# Altium PCB 400236.PcbDoc (part 7 of 7)
Units mm, origin at the board's own origin, x right, y up, seen from the top; angles counter-clockwise.
Board outline 136.53 x 63.5 mm, 4 copper layers (Top Layer, Mid-Layer 1, Mid-Layer 2, Bottom Layer), stack 1.49 mm thick; 344 components, 236 nets, 1364 pads, 1393 vias.
Unrouted connection lines stored in the file: 6.
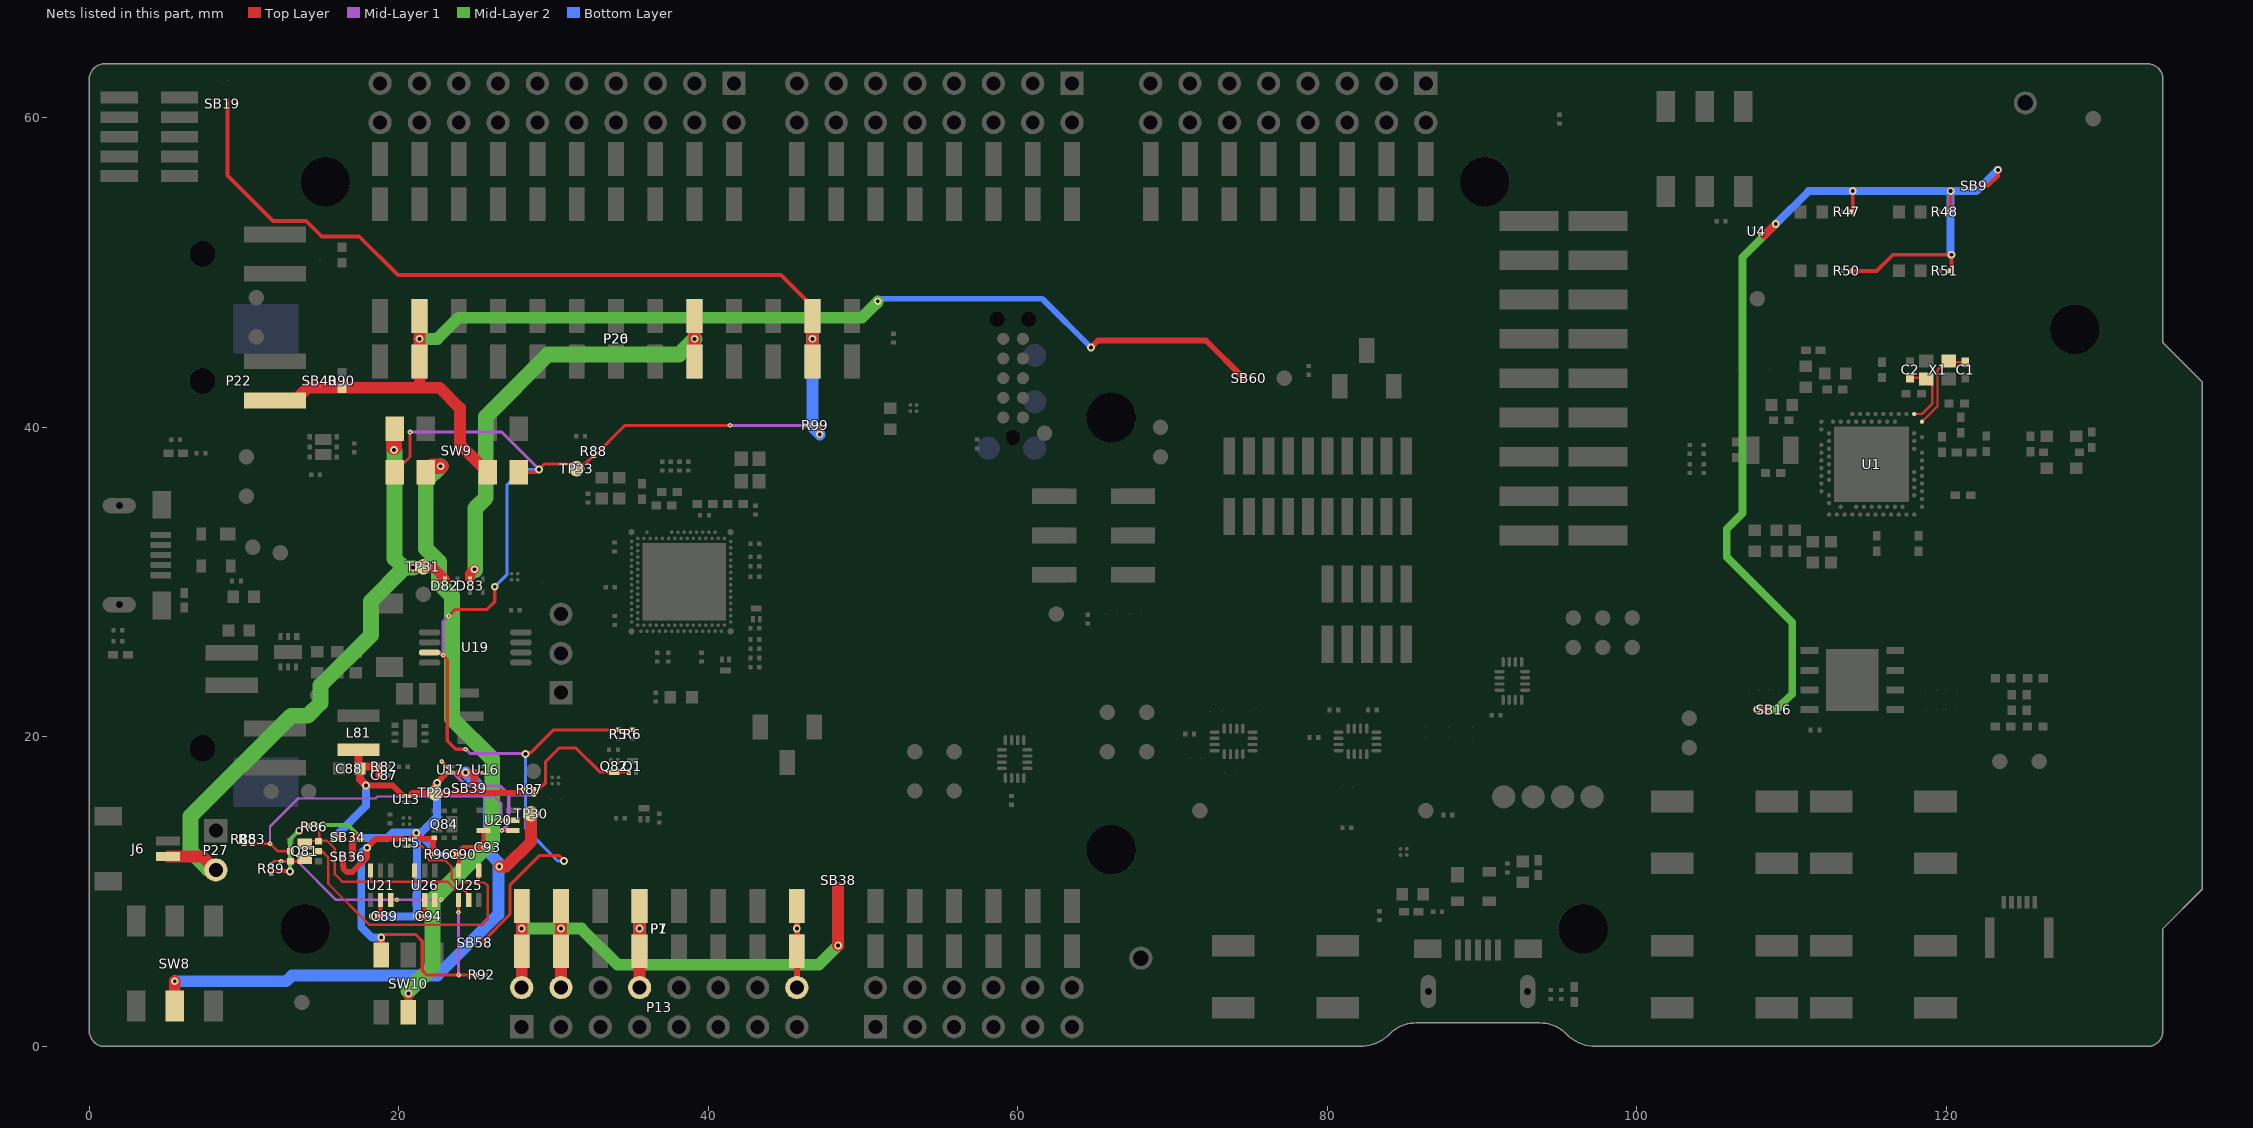
[diagram p7: the nets of this part, all layers, seen from the top]

## Via types
v1: diameter 0.5, hole 0.25, Top Layer to Bottom Layer, tented both sides, 1166 vias
v2: diameter 0.3, hole 0.1, Top Layer to Mid-Layer 1, tented top, 227 vias

## Nets (pads, with @x,y where several pads share a name; then routed paths per layer and width w, separated by ;. In a path a pad name is that pad's centre, name@x,y a point inside that pad or via, vN(x,y) a via of type N, cw(c..) or ccw(c..) an arc to the next point about the centre after c; other vN are vias at no path point) (continued)
VDD_NRF': P20.2 P22.2 P26.2 R90.1 SB40.2 SB60.2 SW9.3 | length 85.3
  Top Layer w0.381: v1(64.719,45.161) 65.176,45.618 72.154,45.618 SB60.2@74.592,43.18
  Top Layer w0.508: P20.2@21.336,44.255 v1(21.336,45.72) P20.2@21.336,47.185
  Top Layer w0.762: P22.2@11.811,41.73 13.284,41.73 14.115,42.561 21.361,42.561 ; P20.2@21.336,47.185 v1(21.336,45.72) P20.2@21.336,44.255 21.361,44.23 21.361,42.561 ; SW9.3@25.749,37.106 23.952,38.903 23.952,41.25 22.641,42.561 21.361,42.561
  Mid-Layer 2 w0.762: v1(21.336,45.72) 22.495,45.72 23.856,47.081 24.748,47.081 49.926,47.081 50.891,48.046 50.891,48.058 50.95,48.118 v1(50.95,48.15)
  Bottom Layer w0.381: v1(50.95,48.15) 50.982,48.15 51.143,48.311 61.57,48.311 v1(64.719,45.161)
  Bottom Layer w0.508: P26.2@21.336,44.255 v1(21.336,45.72) P26.2@21.336,47.185
VDD_NRF_SENSE: R5.1 R6.2 R88.1 R99.1 SB58.1 SW9.1 SW9.4 TP33.1 U19.3 | length 85.6
  Top Layer w0.203: SW9.1@19.749,37.106 20.726,38.084 v2(20.726,39.7) ; U19.3@21.993,25.456 22.677,25.456 v2(22.86,25.273) 23.129,25.004 23.129,19.747 23.673,19.202 v2(24.311,19.202) ; v2(23.216,27.813) 23.647,28.245 25.705,28.245 26.2,28.74 v1(26.2,29.705) ; SB58.1@25.255,6.706 25.356,6.706 27.178,8.528 27.178,10.408 29.117,12.347 30.325,12.347 v1(30.683,11.989) ; SW9.4@27.749,37.106 28.877,37.106 v1(29.058,37.287) 29.413,37.643 32.06,37.643 32.54,38.122 32.54,38.137 32.573,38.171 R88.1@32.588,38.171 ; v1(28.194,18.898) 28.272,18.975 28.525,18.975 30.01,20.46 R5.1@34.175,20.46 R6.2@35.1,20.46 ; R88.1@32.619,38.137 34.613,40.132 v2(41.402,40.132) ; v2(46.25,40.15) R99.1@46.615,40.15
  Mid-Layer 1 w0.203: v2(20.726,39.7) 26.645,39.7 v1(29.058,37.287) ; v2(22.86,25.273) 22.86,27.457 v2(23.216,27.813) ; v2(24.311,19.202) 24.351,19.202 24.634,18.919 28.173,18.919 v1(28.194,18.898) ; v2(41.402,40.132) 46.232,40.132 v2(46.25,40.15)
  Bottom Layer w0.203: v1(26.2,29.705) 27,30.505 27,36.297 27.991,37.287 v1(29.058,37.287) ; v1(28.194,18.898) 28.194,14.078 30.283,11.989 v1(30.683,11.989)
VDD_PER: R47.2 R48.2 R50.2 R51.2 SB9.2 SB16.1 U4.A1 | length 71.5
  Top Layer w0.25: U4.A1@107.95,52.476 108.235,52.476
  Top Layer w0.254: R50.2@113.844,50.107 115.487,50.107 116.535,51.156 v1(120.316,51.156) 120.316,50.269 120.169,50.122 R51.2@120.169,50.107 ; R47.2@113.844,53.917 113.844,53.932 113.94,54.028 v1(113.94,55.271) 113.94,54.443 ; R48.2@120.169,53.917 120.169,53.932 120.265,54.028 v1(120.265,55.264) ; 122.114,55.619 122.289,55.619 122.684,55.619 123.317,56.252 v1(123.317,56.642)
  Top Layer w0.381: v1(107.772,21.768) SB16.1@108.501,21.768
  Top Layer w0.508: 108.229,52.4 v1(108.966,53.137)
  Mid-Layer 2 w0.508: v1(107.772,21.768) 109.017,21.768 110.033,22.784 110.033,27.395 105.804,31.623 105.804,33.44 106.819,34.455 106.819,50.99 v1(108.966,53.137)
  Bottom Layer w0.508: v1(108.966,53.137) 111.093,55.264 v1(120.265,55.264) ; v1@120.265,51.156 v1(120.265,55.264) ; v1(123.317,56.642) 121.939,55.264 v1(120.265,55.264)
VEXT: R92.1 SB36.2 SW10.3 U15.A1 U25.1 | length 27.6
  Top Layer w0.203: v1(18.872,7.036) 19.078,7.241 21.08,7.241 21.514,6.807 21.514,4.928 21.819,4.623 v2(23.876,4.623) R92.1@25.064,4.623 ; SW10.3@18.875,5.914 SW10.3@18.875,6.251 ; v2(23.861,8.676) U25.1@23.861,9.464
  Top Layer w0.381: 16.397,12.265 16.397,11.912 16.402,11.832 16.403,11.824 16.425,11.493 16.643,11.275 17,11.275 17.958,12.233 17.958,12.878 18.504,13.424 U15.A1@20.231,13.424
  Top Layer w0.508: v1(18.872,7.036) 18.872,5.917 SW10.3@18.875,5.914
  Mid-Layer 1 w0.203: v2(23.861,8.676) 23.861,4.638 v2(23.876,4.623)
  Bottom Layer w0.508: v1(17.958,12.842) 17.922,12.842 17.577,12.497 17.577,7.722 18.263,7.036 v1(18.872,7.036)
VEXT_EN: Q81.5 U15.B2 U25.4 | length 23.7
  Top Layer w0.152: Q81.5@14.864,12.624 15.037,12.624 15.443,12.217 15.443,10.516 18.085,7.874 25.4,7.874 25.756,8.23 25.756,10.363 25.527,10.592 25.171,10.592 ; U15.B2@20.698,12.957 21.485,12.957 21.793,12.649 21.793,12.217 21.971,12.039 22.988,12.039 23.419,11.608 23.419,10.846 23.673,10.592 25.171,10.592 ; U25.4@25.161,11.364 25.161,10.602 25.171,10.592
VEXT_EN_INV: Q81.3 R89.2 U21.6 U26.6 | length 14.6
  Top Layer w0.152: R89.2@11.76,11.766 11.775,11.766 11.834,11.825 11.834,11.84 11.975,11.981 12.962,11.981 Q81.3@12.969,11.974 ; Q81.3@12.974,11.974 13.744,11.974 Q81.3@13.919,12.149 ; Q81.3@13.955,11.974 Q81.3@13.995,12.014 ; U21.6@19.471,9.464 19.853,9.464 v2(19.863,9.474) ; U26.6@22.316,9.464 22.326,9.474 v2(22.733,9.474)
  Mid-Layer 1 w0.152: v2(12.395,11.963) 13.462,11.963 15.951,9.474 v2(19.863,9.474) v2(22.733,9.474)
VIN: P1.8 P7.8 P13.16 | length 8.2
  Top Layer w0.381: P13.16@45.72,3.81 P1.8@45.72,6.155 v1(45.72,7.62) P1.8@45.72,9.085
  Bottom Layer w0.381: P7.8@45.72,6.155 v1(45.72,7.62) P7.8@45.72,9.085
VIN3-5V: D83.2 P20.9 P26.9 | length 32.4
  Top Layer w0.635: D83.2@24.613,30.186 24.613,30.556 v1(24.892,30.836)
  Top Layer w0.762: P20.9@39.116,44.255 v1(39.116,45.72) P20.9@39.116,47.185
  Mid-Layer 2 w1.016: v1@24.943,30.785 24.943,34.773 25.629,35.458 25.629,40.691 29.642,44.704 38.1,44.704 v1@39.111,45.714
  Bottom Layer w0.762: P26.9@39.116,44.255 v1(39.116,45.72) P26.9@39.116,47.185
VIO: P1.1 P1.2 P1.4 P7.1 P7.2 P7.4 P13.2 P13.4 P13.8 SB38.1 | length 54.1
  Top Layer w0.381: v1(35.56,7.62) P1.4@35.56,9.085
  Top Layer w0.762: P13.2@27.94,3.81 P1.1@27.94,6.155 P1.1@27.94,9.085 ; P13.4@30.48,3.81 v1(30.48,7.62) P1.2@30.48,9.085 ; P13.8@35.56,3.81 P1.4@35.56,9.085 ; v1(48.387,6.528) 48.387,10.236
  Mid-Layer 2 w0.762: v1(27.94,7.62) v1(30.48,7.62) 31.801,7.62 34.138,5.283 35.535,5.283 ; v1(35.56,7.62) 35.56,5.309 35.535,5.283 ; v1(48.387,6.528) 47.142,5.283 35.535,5.283
  Bottom Layer w0.762: P7.1@27.94,6.155 P7.1@27.94,9.085 ; P7.2@30.48,6.155 P7.2@30.48,9.085 ; P7.4@35.56,6.155 P7.4@35.56,9.085
VIO_REF: P20.12 P26.12 R99.2 SB19.2 | length 58.2
  Top Layer w0.2: R99.2@47.185,40.15 47.185,39.565 v1(47.2,39.55)
  Top Layer w0.25: 8.923,61.138 8.923,56.279 11.877,53.325 14.023,53.325 15.024,52.324 17.45,52.324 19.939,49.835 44.704,49.835 46.736,47.803 P20.12@46.736,47.185
  Top Layer w0.762: P20.12@46.736,44.255 v1(46.736,45.72) P20.12@46.736,47.185
  Bottom Layer w0.762: P26.12@46.736,47.185 v1(46.736,45.72) P26.12@46.736,44.255 46.736,40.014 v1(47.2,39.55)
VLI-ION: D82.2 J6.2 P27.2 SW9.5 TP31.1 | length 42.2
  Top Layer w0.635: v1(20.93,30.937) 22.235,30.937 D82.2@22.987,30.186
  Top Layer w0.762: J6.2@5.105,12.276 7.307,12.276 P27.2@8.179,11.405
  Top Layer w1.016: v1@19.685,38.735 19.685,39.842 SW9.5@19.749,39.906
  Mid-Layer 2 w1.016: P27.2@8.179,11.405 8.086,11.497 7.68,11.497 6.55,12.627 6.55,14.875 13.05,21.375 14.125,21.375 14.95,22.2 14.95,23.325 18.2,26.575 18.2,28.775 20.362,30.937 ; v1@19.725,38.492 19.725,31.532 20.32,30.937 20.362,30.937 ; v1(20.93,30.937) 20.362,30.937
  other v1: 19.685,38.532
VREG: C87.2 C88.2 L81.2 R82.2 SB34.2 U13.A1 | length 11.5
  Top Layer w0.381: v1(17.882,16.866) 19.609,16.866 U13.A1@20.231,16.243
  Top Layer w0.508: v1(15.843,13.509) 16.222,13.509 16.223,13.508 ; L81.2@17.399,19.093 17.399,18.049 C88.2@17.49,17.958 ; v1(17.882,16.866) 17.49,17.257 C88.2@17.49,17.958 ; C87.2@18.79,17.526 18.765,17.551 R82.2@18.765,18.085 17.617,18.085 C88.2@17.49,17.958
  Bottom Layer w0.508: v1(15.843,13.509) 17.882,15.548 v1(17.882,16.866)
VREG_EN: Q81.2 R83.2 R85.1 U20.2 | length 22
  Top Layer w0.152: R85.1@10.004,13.101 R83.2@10.538,13.101 v2(11.684,13.101) 12.161,12.624 Q81.2@12.969,12.624 ; v2(26.619,14.605) U20.2@27.366,14.605
  Mid-Layer 1 w0.152: v2(11.684,13.101) 11.684,14.209 13.499,16.024 18.489,16.024 18.615,16.15 26.166,16.15 26.619,15.697 v2(26.619,14.605)
VREG_EN_INV: Q81.6 R86.2 U21.3 U25.2 U26.3 | length 15.4
  Top Layer w0.152: Q81.6@13.919,13.099 14.094,13.274 Q81.6@14.864,13.274 ; R86.2@14.851,14.2 14.851,13.292 15.359,13.292 15.875,12.776 15.875,11.125 16.358,10.643 18.171,10.643 ; U21.3@18.171,11.364 18.171,10.643 ; U26.3@21.016,11.364 21.016,10.643 ; U25.2@24.511,9.804 24.155,10.16 23.622,10.16 23.139,10.643 21.016,10.643 ; 18.171,10.643 21.016,10.643
VSENSE_SW_OUT: SB39.1 SW8.2 TP30.1 U16.A2 U17.A1 | length 41.3
  Top Layer w0.25: U17.A1@23.517,17.682 23.876,17.682 ; 24.953,17.664 25.36,17.664 U16.A2@25.378,17.682
  Top Layer w0.508: 23.876,17.682 24.308,17.682 24.311,17.684 24.933,17.684 24.971,17.646 24.892,17.566 24.892,17
  Top Layer w0.762: SW8.2@5.528,2.609 v1(5.528,4.216) ; v1(26.492,11.633) 26.949,11.633 28.55,13.233 TP30.1@28.55,14.859
  Bottom Layer w0.762: v1(5.528,4.216) 12.727,4.216 13.106,4.596 22.503,4.596 26.441,8.534 26.441,11.909 25.829,12.521 25.829,16.182 v1(24.308,17.704)
VSRC_NRF: SW9.2 SW10.5 | length 40.6
  Top Layer w0.508: SW10.5@20.625,2.214 v1(20.625,3.429)
  Top Layer w1.016: SW9.2@21.749,37.106 22.133,37.49 v1(22.708,37.49)
  Mid-Layer 2 w1.016: v1@20.625,3.607 22.174,5.156 22.174,9.449 26.035,13.31 26.035,18.593 23.444,21.184 23.444,29.083 22.606,29.921 22.606,31.32 21.749,32.177 21.749,36.532 v1(22.708,37.49)
VSUPPLY: C89.2 C90.2 C93.2 C94.2 Q84.4 R86.1 R87.1 R89.1 R96.1 SB34.1 SB36.1 SB39.2 TP29.1 U13.A2 U15.A2 U17.A2 U20.5 U21.5 U25.5 U26.5 | length 48.9
  Top Layer w0.254: R89.1@11.76,11.196 11.775,11.196 11.908,11.328 v1@12.979,11.328 ; v1(13.564,13.945) 13.571,13.945 13.826,14.2 R86.1@14.265,14.2 ; v1(18.339,8.407) C89.2@18.816,8.407 18.816,9.458 U21.5@18.821,9.464 ; v1(21.184,8.407) C94.2@21.661,8.407 21.661,9.458 U26.5@21.666,9.464 ; U25.5@23.861,11.364 23.896,11.399 C90.2@23.896,12.421 23.896,12.62 24.154,12.878 C93.2@25.471,12.878 25.471,13.95 U20.5@25.466,13.955
  Top Layer w0.381: U15.A2@20.764,13.424 v1(21.128,13.787) 21.504,13.411 22.301,13.411 22.219,13.329 R96.1@22.219,12.471 ; U13.A2@20.777,16.256 20.912,16.391 22.352,16.391 22.352,16.916 v1(22.479,17.043) U17.A2@23.038,17.602 ; TP29.1@22.352,16.383 22.352,16.386 24.201,16.386 24.922,16.386 27.937,16.386 R87.1@28.163,16.612 ; v1(23.444,12.421) C90.2@23.896,12.421
  Top Layer w0.457: 17.022,12.265 17.022,12.618 17.022,13.182 17.022,13.184
  Top Layer w0.508: 17.085,13.469 17.191,13.469 17.544,13.469 v1(17.55,13.475)
  Mid-Layer 2 w0.254: v1(12.979,11.303) 12.979,13.36 v1(13.564,13.945) 13.919,14.3 16.725,14.3 v1(17.55,13.475)
  Bottom Layer w0.381: v1@21.295,13.675 22.55,12.421 v1(23.444,12.421)
  Bottom Layer w0.508: v1(17.55,13.475) 19.257,13.475 19.625,13.843 v1@21.128,13.843 ; v1(18.339,8.407) v1(21.184,8.407) 21.184,13.787 v1@21.128,13.843 ; v1(22.479,17.043) 22.479,14.859 21.463,13.843 v1@21.128,13.843
VSUPPLY_EN: Q1.1 Q82.3 R87.2 U17.B2 U20.1 | length 19.6
  Top Layer w0.152: v2(22.784,18.415) U17.B2@23.117,18.082
  Top Layer w0.203: v2(26.66,13.955) U20.1@27.366,13.955 ; v2(28.733,16.262) R87.2@28.733,16.612 29.058,16.612 29.489,17.043 29.489,18.415 30.362,19.288 31.437,19.288 32.975,17.75 Q82.3@33.925,17.75 Q1.1@34.875,17.75
  Mid-Layer 1 w0.203: v2(22.784,18.415) 24.359,16.84 26.518,16.84 27.096,16.262 ; v2(26.66,13.955) 27.102,14.397 27.102,16.256 27.096,16.262 ; v2(28.733,16.262) 27.096,16.262
XC1: C1.1 U1.B24 X1.1 | length 5.8
  Top Layer w0.152: U1.B24@118.414,40.367 119.414,41.367 119.414,43.717 119.909,44.213 C1.1@121.203,44.213
XC2: C2.1 U1.A23 X1.3 | length 4.3
  Top Layer w0.152: C2.1@117.647,43.213 118.625,43.213 X1.3@118.7,43.138 119.089,42.749 119.089,41.538 118.418,40.867 U1.A23@117.914,40.867
pads on no net: Fid1.0 Fid2.0 J2.4 J2.6@1.944,28.55 J2.6@1.944,34.95 J3.4 J3.6@86.529,3.557 J3.6@92.929,3.557 J4.0 J4.6 J4.7 J4.8 J4.9 J5.0 J5.1 J5.3 J5.5 J6.0 P18.7 P18.8 P19.7 P19.8 P19.9 P21.0 P22.0 P23.0 P25.7 P25.8 P25.11 P25.13 SW8.1 U2. U2.A1 U2.A17 U2.A21 U2.A31 U2.AB2 U2.AD2 U2.AE1 U2.AE31 U2.AF2 U2.AG31 U2.AH2 U2.AJ1 U2.AK2 U2.AK4 U2.AK6 U2.AK8 U2.AK10 U2.AK12 U2.AK14 U2.AK16 U2.AK18 U2.AK20 U2.AL1 U2.AL13 U2.AL15 U2.AL21 U2.AL23 U2.AL31 U2.B10 U2.B14 U2.D2 U2.F2 U2.J1 U2.K2 U2.M2 U2.P2 U2.R31 U2.T2 U2.V2 U2.Y2 U5.1 U5.9 U5.13 U6.1 U6.5 U6.9 U6.13 U7.7 U7.11 U8.11 U8.12 U8.13

## Polygon pours and split planes (outlines as drawn)
VDD on Mid-Layer 2 "Mid_Layer_2-VDD" (solid, remove dead copper, pour order 10): -3.81,-3.81 -3.81,68.58 138.43,68.58 138.43,-3.81
VDD_IMCU on Mid-Layer 2 "Mid_Layer_2-VDD_IMCU" (solid, remove dead copper, pour order 8): 33.025,35.987 33.025,25.093 43.937,25.093 43.937,35.987
GND on Bottom Layer "Bottom_Layer-GND" (solid, remove dead copper, pour order 6): -3.81,-3.81 -3.81,68.58 138.43,68.58 138.43,-3.81
GND on Mid-Layer 1 "Mid_Layer_1-GND" (solid, remove dead copper, pour order 7): -3.81,-3.81 -3.81,68.58 138.43,68.58 138.43,-3.81
GND on Top Layer "Top_Layer-GND" (solid, remove dead copper, pour order 12): -3.81,-3.81 -3.81,68.58 138.43,68.58 138.43,-3.81

## Keep-outs
Top Layer:
  lines w0.152: 90.89,53.591 cw(c90.17,55.88) 91.893,54.209
Mid-Layer 1:
  circle w0.152: c90.17,55.88 r2.4
Mid-Layer 2:
  circle w0.152: c90.17,55.88 r2.4
Bottom Layer:
  circle w0.152: c90.17,55.88 r2.4
Keep-Out Layer:
  circle w0.152: c13.97,7.62 r2.4
  circle w0.152: c66.04,12.7 r2.4
  circle w0.152: c128.27,46.355 r2.4
  circle w0.152: c15.24,55.88 r2.4
  circle w0.152: c66.04,40.64 r2.4
  circle w0.152: c96.52,7.62 r2.4
  circle w0.1: c13.967,0 r0.3
  circle w0.1: c15.067,0 r0.3
  circle w0.1: c16.167,0 r0.3
  circle w0.1: c123.987,0 r0.3
  circle w0.1: c122.887,0 r0.3
  circle w0.1: c121.787,0 r0.3
  circle w0.1: c136.526,42.025 r0.3
  circle w0.1: c136.526,40.926 r0.3
  circle w0.1: c136.526,39.826 r0.3
  circle w0.1: c121.787,63.5 r0.3
  circle w0.1: c122.887,63.5 r0.3
  circle w0.1: c123.987,63.5 r0.3
  circle w0.1: c13.967,63.5 r0.3
  circle w0.1: c15.067,63.5 r0.3
  circle w0.1: c16.167,63.5 r0.3
  circle w0.1: c0,48.692 r0.3
  circle w0.1: c0,49.792 r0.3
  circle w0.1: c0,50.891 r0.3
  circle w0.1: c0,17.705 r0.3
  circle w0.1: c0,18.804 r0.3
  circle w0.1: c0,19.904 r0.3

## Other copper
Top Layer:
  rectangle net V5V: 13.231,24.103 13.866,24.738
  rectangle net ANT: 134.92,20.343 136.19,21.105
  pour cut-out: 17.625,25.8 18.65,25.8 18.775,25.675 18.775,25 18.375,24.6 17.725,24.6 17.625,24.7 17.625,24.875
  pour cut-out: 90.658,5.004 90.658,7.315 96.62,7.315 96.62,5.004
  pour cut-out: 91.161,32.131 91.161,33.401 89.891,33.401 89.891,32.131
  pour cut-out: 107.164,32.217 107.164,33.617 110.834,33.617 110.834,32.217
  pour cut-out: 110.664,31.367 110.664,32.867 113.164,32.867 113.164,31.367
  pour cut-out: 115.414,36.867 115.414,38.367 117.914,38.367 117.914,36.867
  pour cut-out: 117.737,33.63 116.676,34.691 118.444,36.458 119.505,35.398
  pour cut-out: 60.528,30.937 68.073,30.937 68.071,32.715 60.528,32.715
  pour cut-out: 129.92,-1.27 136.786,-1.27 136.748,45.415 129.925,45.415
  pour cut-out: -0.229,28.204 2.824,28.204 2.818,35.281 -0.228,35.281
  pour cut-out: 28.981,25.603 28.981,26.873 27.711,26.873 27.711,25.603
  pour cut-out: 118.567,26.975 117.297,26.975 117.297,25.705 118.567,25.705
  pour cut-out: 11.252,51.765 9.982,51.765 9.982,50.495 11.252,50.495
  pour cut-out: 86.385,35.687 85.115,35.687 85.115,34.417 86.385,34.417
  pour cut-out: 60.757,53.086 48.387,53.086 48.387,51.816 60.757,51.816
  pour cut-out: 107.163,43.256 107.163,44.526 105.054,44.526 105.054,43.256
  pour cut-out: 22.149,1.168 22.149,2.438 20.879,2.438 20.879,1.168
  pour cut-out: 20.447,5.715 20.447,6.985 19.177,6.985 19.177,5.715
  pour cut-out: 20.218,1.143 20.218,3.264 18.948,3.264 18.948,1.143
  pour cut-out: 11.252,43.635 9.982,43.635 9.982,42.365 11.252,42.365
  pour cut-out: 118.496,37.293 121.239,37.293 121.239,39.142 120.439,39.142 120.439,40.188 118.496,40.188
Mid-Layer 1:
  pour cut-out: 110.28,27.254 110.28,21.336 106.28,21.336 106.28,27.254
  pour cut-out: 121.71,25.984 121.71,20.066 117.71,20.066 117.71,25.984
  pour cut-out: 49.126,39.244 49.126,41.556 51.5,41.556 51.5,39.244
  pour cut-out: 110.28,18.44 107.467,18.44 107.467,25.333 110.28,25.333
  pour cut-out: 28.315,29.25 28.315,31.318 30.325,31.318 30.325,29.25
  pour cut-out: 92.078,58.763 92.078,61.074 95.377,61.074 95.377,58.763
  pour cut-out: 85.782,11.379 85.782,13.691 88.157,13.691 88.157,11.379
  pour cut-out: 129.92,-1.27 136.786,-1.27 136.748,45.415 129.925,45.415
  pour cut-out: 104.44,46.723 110.357,46.723 110.357,42.723 104.44,42.723
  pour cut-out: 15.45,11.557 15.45,14.529 17.824,14.529 17.824,11.557
  pour cut-out: 23.4,15.494 23.4,17.805 25.774,17.805 25.774,15.494
  pour cut-out: 56.725,19.202 56.725,21.514 59.099,21.514 59.099,19.202
  pour cut-out: 56.598,17.094 56.598,19.406 58.972,19.406 58.972,17.094
  pour cut-out: 60.618,17.843 60.618,20.155 62.992,20.155 62.992,17.843
  pour cut-out: 59.969,14.973 59.969,17.285 62.344,17.285 62.344,14.973
  pour cut-out: 64.878,26.695 64.878,29.007 68.656,29.007 68.656,26.695
  pour cut-out: 120.612,48.831 120.612,57.137 122.987,57.137 122.987,48.831
  pour cut-out: 7.449,59.95 7.449,63.449 9.823,63.449 9.823,59.95
  pour cut-out: 70.263,17.45 70.263,19.761 72.637,19.761 72.637,17.45
  pour cut-out: 71.438,20.587 71.438,22.898 73.812,22.898 73.812,20.587
  pour cut-out: 74.175,20.512 74.175,22.823 76.549,22.823 76.549,20.512
  pour cut-out: 73.369,16.612 73.369,18.923 75.744,18.923 75.744,16.612
  pour cut-out: 28.448,14.884 28.448,17.196 31.747,17.196 31.747,14.884
  pour cut-out: 80.042,13.995 80.042,18.161 82.416,18.161 82.416,13.995
  pour cut-out: 84.979,19.177 84.979,21.488 90.941,21.488 90.941,19.177
  pour cut-out: 13.678,49.898 13.678,52.21 16.053,52.21 16.053,49.898
  pour cut-out: 13.704,41.87 13.704,44.181 16.078,44.181 16.078,41.87
  pour cut-out: 47.232,9.614 47.232,11.925 49.606,11.925 49.606,9.614
  pour cut-out: 23.654,5.486 23.654,7.798 26.028,7.798 26.028,5.486
  pour cut-out: 73.641,41.986 73.641,44.298 76.016,44.298 76.016,41.986
  pour cut-out: 73.667,40.03 73.667,42.342 76.041,42.342 76.041,40.03
  pour cut-out: 131.445,36.392 119.918,36.392 119.918,40.392 131.445,40.392
Mid-Layer 2:
  pour cut-out: 27.742,32.85 26.8,32.85 26.8,32.925 27.75,32.925
  pour cut-out: 129.92,-1.27 136.786,-1.27 136.748,45.415 129.925,45.415
  pour cut-out: 131.445,36.392 119.918,36.392 119.918,40.392 131.445,40.392
Bottom Layer:
  pour cut-out: 129.92,-1.27 136.786,-1.27 136.748,45.415 129.925,45.415

## Silkscreen, mask and mechanical layers (free items; w line width, h text height)
Top Overlay:
  drawing of 85 lines, arcs and shapes, not listed
  text "nRF ONLY" at 97.765,62.052 h1.65
  text "DEFAULT" at 104.877,62.052 h1.65
  text "GND" at 12.225,61.7 h1.8
  text "GND" at 91.389,61.709 h1.8
  text ".PCBNumber" at 116.028,61.468 h2
  text ".PCBRevision" at 116.093,60.165 h1.5
  text "GND" at 123.469,58.471 h1.8
  text "LED1" at 109.622,54.654 h2.03
  text "LED2" at 115.82,54.654 h2.03
  text "Debug out" at 0.406,54.127 h1.78
  text "P0.11" at 87.757,52.781 h1.65
  text "P0.12" at 99.568,52.781 h1.65
  text "LED3" at 109.495,50.869 h2.03
  text "LED4" at 115.845,50.869 h2.03
  text "VDD_HV" at 1.016,50.775 h1.4
  text "P0.13" at 87.757,50.241 h1.65
  text "P0.14" at 99.568,50.241 h1.65
  text "P0.27" at 19.304,49.661 h1.65 r90
  text "P0.26" at 21.844,49.661 h1.65 r90
  text "P0.02" at 24.384,49.661 h1.65 r90
  text "GND" at 26.924,49.661 h1.65 r90
  text "P1.15" at 29.464,49.661 h1.65 r90
  text "P1.14" at 32.004,49.661 h1.65 r90
  text "P1.13" at 34.544,49.661 h1.65 r90
  text "P1.12" at 37.084,49.661 h1.65 r90
  text "P1.11" at 39.624,49.661 h1.65 r90
  text "P1.10" at 42.164,49.661 h1.65 r90
  text "P1.08" at 46.228,49.661 h1.65 r90
  text "P1.07" at 48.768,49.661 h1.65 r90
  text "P1.06" at 51.308,49.661 h1.65 r90
  text "P1.05" at 53.848,49.661 h1.65 r90
  text "P1.04" at 56.388,49.661 h1.65 r90
  text "P1.03" at 58.928,49.661 h1.65 r90
  text "P1.02" at 61.468,49.661 h1.65 r90
  text "P0.10" at 69.088,49.661 h1.65 r90
  text "P0.09" at 71.628,49.661 h1.65 r90
  text "P0.08" at 74.168,49.661 h1.65 r90
  text "P0.07" at 76.708,49.661 h1.65 r90
  text "P0.06" at 79.248,49.661 h1.65 r90
  text "P0.05" at 81.788,49.661 h1.65 r90
  text "P0.01" at 84.328,49.661 h1.65 r90
  text "P0.00" at 86.868,49.661 h1.65 r90
  text "P0.15" at 87.757,47.701 h1.65
  text "P0.16" at 99.568,47.701 h1.65
  text "nRF current" at 0.483,47.193 h1.78
  text "measurement" at 0.483,45.898 h1.78
  text "For evaluation only; / not FCC approved for resale." at 133.655,45.575 h1.52 r90
  text "Alt." at 79.756,45.339 h1.65
  text "Def." at 83.439,45.339 h1.65
  text "P0.17" at 87.757,45.161 h1.65
  text "P0.18" at 99.568,45.161 h1.65
  text "GPIO" at 102.997,44.958 h1.4
  text "XTAL" at 102.997,43.688 h1.4
  text "P0.19" at 87.757,42.621 h1.65
  text "P0.20" at 99.568,42.621 h1.65
  text "VDD" at 1.016,42.57 h1.4
  text "VIO / REF" at 47.705,40.946 h1.14 r90
  text "SWD / SEL" at 24.65,40.775 h1.14 r90
  text "VDD / nRF" at 19.761,40.755 h1.14 r90
  text "VDD / nRF'" at 22.301,40.755 h1.14 r90
  text "SWO" at 31.825,40.65 h1.14 r90
  text "(ARDUINO D0) P1.01" at 64.059,40.552 h1.65 r90
  text "SWD / IO" at 27.508,40.527 h1.14 r90
  text "SWD / CLK" at 30.048,40.527 h1.14 r90
  text "TRACE" at 80.391,40.513 h1.65
  text "RESET" at 34.4,40.35 h1.14 r90
  text "P0.21" at 87.757,40.081 h1.65
  text "P0.22" at 99.568,40.081 h1.65
  text "VIN / 3-5V" at 40.1,39.85 h1.14 r90
  text "VDD / nRF_HV" at 42.625,38.975 h1.14 r90
  text "VDD / nRF_HV'" at 45.161,38.803 h1.14 r90
  text "P0.23" at 87.757,37.541 h1.65
  text "P0.24" at 99.568,37.541 h1.65
  text "IMCU USB" at 0.381,36.195 h2.29
  text "P1.14" at 57.889,35.082 h1.52
  text "5V" at 69.248,35.031 h1.52
  text "P0.25" at 87.757,35.001 h1.65
  text "P1.00" at 99.568,35.001 h1.65
  text "Li-Po   VDD   USB" at 18.313,34.95 h1.65
  text "nRF power source" at 17.12,33.299 h2.03
  text "P1.13" at 69.248,32.567 h1.52
  text "P1.15" at 57.918,32.542 h1.52
  text "P1.09" at 87.757,32.461 h1.65
  text "GND" at 99.568,32.461 h1.65
  text "DETECT" at 69.248,30.024 h1.52
  text "RESET" at 56.955,30.002 h1.52
  text "Debug in" at 79.052,23.3 h2
  text "SB20-22" at 106.934,22.225 h1.52 r90
  text "SB10-12" at 110.465,22.225 h1.52 r90
  text "External / supply" at -1.5,21.925 h1.78
  text "FLOW  / CONTROL" at 41.881,21.589 h1.65
  text "SB13-15" at 118.364,21.463 h1.52 r90
  text "SB23-25" at 121.92,21.463 h1.52 r90
  text "-" at 14.007,19.854 h3
  text "VCOM" at 37.05,18.825 h1.65
  text "BUTTON 1" at 102.594,17.19 h1.78
  text "BUTTON 2" at 112.641,17.19 h1.78
  text "+" at 13.737,17.065 h3
  text "ON" at 42.2,16.625 h1.65
  text "OFF" at 45.9,16.625 h1.65
  text "Li-po" at 2.825,15.425 h1.78
  text "-" at 5.487,13.582 h3
  text "N.C." at 46.253,10.465 h1.65 r90
  text "VDD" at 28.365,10.462 h1.65 r90
  text "VDD" at 30.905,10.462 h1.65 r90
  text "RESET" at 33.445,10.462 h1.65 r90
  text "VDD" at 35.985,10.462 h1.65 r90
  text "5V" at 38.525,10.462 h1.65 r90
  text "GND" at 41.065,10.462 h1.65 r90
  text "GND" at 43.605,10.462 h1.65 r90
  text "P0.03 (A0)" at 51.225,10.462 h1.65 r90
  text "P0.04" at 53.765,10.462 h1.65 r90
  text "P0.28" at 56.305,10.462 h1.65 r90
  text "P0.29" at 58.845,10.462 h1.65 r90
  text "P0.30" at 61.385,10.462 h1.65 r90
  text "P0.31" at 63.925,10.462 h1.65 r90
  text "+" at 5.216,10.332 h3
  text "NFC" at 123.123,9.926 h2.29
  text "BUTTON 4" at 112.691,8.011 h1.78
  text "BUTTON 3" at 102.518,8 h1.78
  text "RESET" at 75.31,7.871 h1.78
  text "nRF52840 USB" at 84.861,7.087 h1.78
  text "VEXT   nRF" at 16.662,6.807 h1.78
  text "GND" at 69.139,5.182 h1.8
  text "Power" at 11.506,3.2 h2.03 r90
  text "GND" at 68.402,0.761 h1.8
  text ".ProductName" at 132.669,0.755 h3 r90
  text "ON" at 2.911,0.229 h1.78
  text "OFF" at 5.655,0.229 h1.78
  text "OFF" at 18.009,0.203 h1.78
  text "ON" at 21.438,0.203 h1.78
Bottom Overlay:
  drawing of 1286 lines, arcs and shapes, not listed
  text "J-Link" at 10.033,62.614 h1.45 r90
  text "www.segger.com" at 11.184,62.532 h1.68 r90
  text "TM" at 9.611,59.144 h0.94 r90
  text "S" at 8.174,58.931 h1.35 r90
  text "E" at 8.174,58.041 h1.35 r90
  text "Technology" at 10.033,57.861 h1.45 r90
  text "G" at 8.174,57.257 h1.35 r90
  text "G" at 8.174,56.266 h1.35 r90
  text "E" at 8.174,55.242 h1.35 r90
  text "R" at 8.174,54.407 h1.35 r90
  text "P0.27" at 19.228,53.111 h1.52 r90
  text "P0.26" at 21.768,53.111 h1.52 r90
  text "P0.02" at 24.308,53.111 h1.52 r90
  text "GND" at 26.849,53.111 h1.52 r90
  text "P1.15" at 29.388,53.111 h1.52 r90
  text "P1.14" at 31.928,53.111 h1.52 r90
  text "P1.13" at 34.468,53.111 h1.52 r90
  text "P1.12" at 37.008,53.111 h1.52 r90
  text "P1.11" at 39.548,53.111 h1.52 r90
  text "P1.10" at 42.088,53.111 h1.52 r90
  text "P1.08" at 46.152,53.111 h1.52 r90
  text "P1.07" at 48.693,53.111 h1.52 r90
  text "P1.06 (D5)" at 51.233,53.111 h1.52 r90
  text "P1.05 (D4)" at 53.773,53.111 h1.52 r90
  text "P1.04 (D3)" at 56.313,53.111 h1.52 r90
  text "P1.03 (D2)" at 58.853,53.111 h1.52 r90
  text "P1.02 (D1)" at 61.393,53.111 h1.52 r90
  text "P1.01 (ARDUINO D0)" at 63.933,53.111 h1.52 r90
  text "P0.10" at 69.038,53.111 h1.52 r90
  text "P0.09" at 71.578,53.111 h1.52 r90
  text "P0.08" at 74.118,53.111 h1.52 r90
  text "P0.07" at 76.658,53.111 h1.52 r90
  text "P0.06" at 79.198,53.111 h1.52 r90
  text "P0.05" at 81.738,53.111 h1.52 r90
  text "P0.01" at 84.278,53.111 h1.52 r90
  text "P0.00" at 86.793,53.111 h1.52 r90
  text "(SCL)" at 20.346,52.07 h1.52 r90
  text "(SDA)" at 22.886,52.07 h1.52 r90
  text "(AREF)" at 25.426,52.07 h1.52 r90
  text "(D13)" at 30.506,52.07 h1.52 r90
  text "(D12)" at 33.046,52.07 h1.52 r90
  text "(D11)" at 35.586,52.07 h1.52 r90
  text "(D10)" at 38.126,52.07 h1.52 r90
  text "(D9)" at 40.666,52.07 h1.52 r90
  text "(D8)" at 43.206,52.07 h1.52 r90
  text "(D7)" at 47.27,52.07 h1.52 r90
  text "(D6)" at 49.81,52.07 h1.52 r90
  text "GPIO" at 76.911,48.701 h1.99 r90
  text "P0.00" at 80.747,48.441 h1.65 r90
  text "P0.01" at 86.131,48.441 h1.65 r90
  text "P0.11" at 90.17,48.441 h1.65 r90
  text "P0.12" at 92.862,48.441 h1.65 r90
  text "P0.24" at 95.555,48.441 h1.65 r90
  text "P0.25" at 98.247,48.441 h1.65 r90
  text "P0.13" at 100.94,48.441 h1.65 r90
  text "P0.14" at 103.632,48.441 h1.65 r90
  text "P0.15" at 106.324,48.441 h1.65 r90
  text "P0.16" at 109.017,48.441 h1.65 r90
  text "P0.17" at 111.713,48.459 h1.65 r90
  text "P0.19" at 114.405,48.459 h1.65 r90
  text "P0.20" at 117.098,48.459 h1.65 r90
  text "P0.21" at 119.79,48.459 h1.65 r90
  text "P0.22" at 122.483,48.459 h1.65 r90
  text "P0.23" at 125.175,48.459 h1.65 r90
  text "Function" at 76.9,42.875 h1.99 r90
  text "Button 1" at 90.12,42.415 h1.65 r90
  text "Button 2" at 92.812,42.415 h1.65 r90
  text "Button 3" at 95.505,42.415 h1.65 r90
  text "Button 4" at 98.197,42.415 h1.65 r90
  text "GPIO" at 27.3,41.775 h1.99 r90
  text "LED 1" at 100.915,41.622 h1.65 r90
  text "LED 2" at 103.607,41.622 h1.65 r90
  text "LED 3" at 106.299,41.622 h1.65 r90
  text "LED 4" at 108.992,41.622 h1.65 r90
  text "P0.05" at 29.82,41.583 h1.65 r90
  text "P0.06" at 32.512,41.583 h1.65 r90
  text "P0.07" at 35.204,41.583 h1.65 r90
  text "P0.08" at 37.897,41.583 h1.65 r90
  text "P0.18" at 40.589,41.583 h1.65 r90
  text "P1.00" at 43.282,41.583 h1.65 r90
  text "P0.09" at 52.222,41.583 h1.65 r90
  text "P0.10" at 56.794,41.583 h1.65 r90
  text "DIO0" at 117.098,41.5 h1.65 r90
  text "DIO1" at 119.79,41.5 h1.65 r90
  text "DIO2" at 122.483,41.5 h1.65 r90
  text "DIO3" at 125.175,41.5 h1.65 r90
  text "CLK" at 114.405,41.319 h1.65 r90
  text "XL2" at 86.131,41.111 h1.65 r90
  text "XL1" at 80.747,41.015 h1.65 r90
  text "CS" at 111.713,40.711 h1.65 r90
  text "SWDCLK" at 48.666,39.218 h1.65 r90
  text "SWDIO" at 45.925,38.7 h1.65 r90
  text "Function" at 27.3,36.025 h1.99 r90
  text "SB13/23" at 111.713,35.248 h1.65 r90
  text "SB11/21" at 114.405,35.248 h1.65 r90
  text "SB12/22" at 117.098,35.248 h1.65 r90
  text "SB14/24" at 119.79,35.248 h1.65 r90
  text "SB15/25" at 122.483,35.248 h1.65 r90
  text "SB10/20" at 125.175,35.248 h1.65 r90
  text "RESET" at 40.513,34.804 h1.65 r90
  text "NFC2" at 56.82,34.816 h1.65 r90
  text "NFC1" at 52.248,34.72 h1.65 r90
  text "SB2" at 79.4,34.671 h1.65 r90
  text "SB4" at 82.093,34.671 h1.65 r90
  text "SB1" at 84.785,34.671 h1.65 r90
  text "SB3" at 87.478,34.671 h1.65 r90
  text "SB5" at 100.94,34.671 h1.65 r90
  text "SB6" at 103.632,34.671 h1.65 r90
  text "SB7" at 106.324,34.671 h1.65 r90
  text "SB8" at 109.017,34.671 h1.65 r90
  text "SWO" at 43.231,34.573 h1.65 r90
  text "TXD" at 32.462,34.249 h1.65 r90
  text "RXD" at 37.846,34.259 h1.65 r90
  text "Short" at 76.911,34.155 h1.99 r90
  text "CTS" at 35.154,34.125 h1.65 r90
  text "RTS" at 29.769,34.044 h1.65 r90
  text "HW" at 27.73,28.448 h1.99 r90
  text "GPIO" at 85.083,27.927 h1.52 r90
  text "GPIO" at 120.015,27.927 h1.52 r90
  text "GPIO" at 34.773,27.813 h1.52 r90
  text "IMCU" at 43.334,27.812 h1.52 r90
  text "GPIO" at 57.93,26.381 h1.52 r90
  text "HW" at 76.911,25.519 h1.99 r90
  text "N.C" at 54.864,25.4 h1.27 r90
  text "SB2x" at 115.443,25.057 h1.27 r90
  text "SB1x" at 117.729,25.057 h1.27 r90
  text "PIN" at 50.883,24.171 h1.52 r90
  text "MEM" at 120.019,23.271 h1.52 r90
  text "VDD" at 101.803,23.126 h1.52 r90
  text "PIN" at 80.574,22.364 h1.52 r90
  text "PIN" at 115.57,22.364 h1.52 r90
  text "0R" at 57.658,22.225 h1.27 r90
  text "IF OFF" at 38.735,21.209 h1.52 r90
  text "NFC" at 53.957,21.224 h1.52 r90
  text "Button 1" at 106.324,18.061 h1.65 r90
  text "Button 2" at 108.9,18.061 h1.65 r90
  text "Function" at 103.775,18.05 h1.99 r90
  text "Function" at 116.916,17.284 h1.52 r90
  text "Default" at 124.474,17.183 h1.52 r90
  text "CTS" at 111.709,16.429 h1.65 r90
  text "P0.03 (A0)" at 51.181,16.393 h1.52 r90
  text "P0.30 (A4)" at 61.335,16.35 h1.52 r90
  text "P0.28 (A2)" at 56.261,16.229 h1.52 r90
  text "P0.29 (A3)" at 58.801,16.215 h1.52 r90
  text "P0.04 (A1)" at 53.721,16.083 h1.52 r90
  text "P0.31 (A5)" at 63.881,15.969 h1.52 r90
  text "RESET" at 33.447,13.808 h1.52 r90
  text "GND" at 41.067,13.139 h1.52 r90
  text "GND" at 43.53,13.139 h1.52 r90
  text "VDD" at 28.373,12.977 h1.52 r90
  text "VDD" at 30.913,12.977 h1.52 r90
  text "VDD" at 35.993,12.977 h1.52 r90
  text "N.C." at 46.197,12.665 h1.52 r90
  text "5V" at 38.558,11.889 h1.52 r90
  text "HW" at 114.249,11.676 h1.99 r90
  text "P0.11" at 106.224,10.079 h1.65 r90
  text "P0.12" at 108.917,10.079 h1.65 r90
  text "P0.07" at 111.609,10.079 h1.65 r90
  text "Def." at 103.835,9.957 h1.99 r90
  text "Alternative" at 124.46,9.055 h1.52 r90
  text "Pb" at 10.019,9.036 h3.05 r90
  text "TRACE / SW" at 121.234,8.648 h1.52 r90
  text "P1.07" at 106.224,5.301 h1.65 r90
  text "P1.08" at 108.917,5.301 h1.65 r90
  text "P0.04" at 111.609,5.301 h1.65 r90
  text "Alt." at 103.835,4.691 h1.99 r90
Board Outline:
  the board outline again, w0.254
Top Assembly:
  drawing of 47 lines, arcs and shapes, not listed
Bottom Assembly:
  drawing of 47 lines, arcs and shapes, not listed
Top Impedance:
  lines w0.138: 4.619,31.75 6.34,31.75 cw(c6.34,31.242) 6.699,31.601 7.244,31.055 7.244,31.062 7.754,31.571 ; 4.619,32.398 6.34,32.398 ccw(c6.34,32.906) 6.699,32.546 7.234,33.082 ; 7.244,33.099 7.248,33.095 7.754,32.59 ccw(c8.552,33.388) 8.552,32.259 11.506,32.259 ccw(c11.506,32.571) 11.727,32.35 11.811,32.434 cw(c12.344,31.901) 12.344,32.655 cw(c12.344,31.897) 12.88,32.433 12.964,32.349 ccw(c13.183,32.568) 13.163,32.259 ccw(c13.153,32.935) 13.631,32.457 14.84,33.666 ; 14.837,33.669 cw(c16.073,32.433) 16.063,34.181 ; 35.439,32.827 35.439,33.303 ; 35.839,32.827 35.839,32.877 35.714,33.002 35.714,33.379 ; 89.086,5.985 89.086,8.495 ccw(c88.578,8.495) 88.938,8.855 88.402,9.39 88.912,9.899 ccw(c88.114,10.697) 89.242,10.697 89.242,12.23 cw(c91.338,12.23) 91.338,14.326 ccw(c91.338,16.411) 92.813,14.936 94.183,16.307 ; 89.734,5.983 89.734,8.495 cw(c90.242,8.495) 89.883,8.855 ; 89.883,8.854 90.429,9.4 ; 90.44,9.39 89.931,9.899 cw(c90.729,10.697) 89.6,10.697 89.6,12.232 cw(c91.338,12.232) 91.338,13.97 ccw(c91.338,16.418) 93.069,14.687 93.522,15.139 ccw(c93.294,16.129) 94.284,15.901 ; 94.204,16.333 cw(c95.199,16.129) 94.995,17.124 ; 94.284,15.902 106.34,27.958 cw(c108.136,26.162) 108.136,28.702 113.295,28.702 ; 94.998,17.121 106.088,28.211 cw(c108.136,26.162) 108.136,29.06 113.295,29.06 ccw(c113.295,29.693) 113.928,29.693 113.928,32.467 ccw(c113.29,32.467) 113.741,32.918 113.244,33.415 cw(c113.89,34.061) 112.977,34.061 ; 112.914,34.367 112.982,34.299 112.982,34.061 ; 113.295,28.702 ccw(c113.295,29.693) 114.286,29.693 114.286,32.467 ccw(c113.29,32.467) 113.994,33.172 113.498,33.669 cw(c113.89,34.061) 113.335,34.061 113.335,34.289 113.414,34.367 ; 7.754,31.571 cw(c8.551,30.773) 8.551,31.901 ; 7.754,31.571 cw(c8.551,30.773) 8.551,31.901 ; 8.551,31.901 9.728,31.901 cw(c9.728,31.592) 9.947,31.811 10.031,31.727 ccw(c10.566,32.263) 10.566,31.505 ccw(c10.566,32.259) 11.1,31.726 11.184,31.81 cw(c11.405,31.589) 11.405,31.901 13.147,31.901 ccw(c13.147,32.944) 13.884,32.207 15.102,33.425 15.107,33.43 ; 15.107,33.43 cw(c16.063,32.464) 15.112,33.435 cw(c16.063,32.464) 16.063,33.823 34.737,33.823 cw(c34.737,33.062) 35.275,33.6 35.276,33.6 35.344,33.532 ; 15.107,33.43 15.107,33.43 ; 16.063,34.181 cw(c16.073,32.433) 16.073,34.181 ; 16.063,34.181 16.073,34.181 ; 16.073,34.181 34.737,34.181 ; 34.737,34.181 cw(c34.737,33.081) 35.515,33.859 cw(c35.035,33.379) 35.714,33.379 ; 34.737,34.181 34.737,34.181 ; 35.344,33.532 cw(c35.115,33.303) 35.439,33.303 ; 35.344,33.532 ccw(c35.115,33.303) 35.344,33.532 ; 35.344,33.532 35.344,33.532 ; 35.439,33.303 35.439,33.303 ; 35.714,33.379 35.714,33.379
  lines w0.871: 121.681,38.379 126.25,38.379
  text "50ohm impedance" at 115.824,39.37 h2
  text "90ohm differensial impedance" at 7.417,35.382 h2
  text "90ohm differensial impedance" at 90.119,14.402 h2 r45
Top Via Capping (Mech16):
  text "All 0.250mm through holes: IPC-4761 Type VII" at 36.75,34.975 h2
  text "All blind holes filled with copper" at 36.75,32.4 h2

## Dimensions
132.969,62.484 to 136.175,65.69 on Dimensions
0,1.016 to 90.17,55.88 on Dimensions
0,1.016 to 133.985,1.016 on Dimensions
0,1.016 to 136.525,10.16 on Dimensions
0,1.016 to 13.97,7.62 on Dimensions
0,1.016 to 15.24,55.88 on Dimensions
0,1.016 to 66.04,12.7 on Dimensions
0,1.016 to 96.52,7.62 on Dimensions
132.969,0 to 132.969,63.5 on Dimensions
132.969,0 to 96.52,7.62 on Dimensions
132.969,0 to 66.04,12.7 on Dimensions
132.969,0 to 66.04,40.64 on Dimensions
132.969,0 to 15.24,55.88 on Dimensions
132.969,0 to 128.27,46.355 on Dimensions
0,1.016 to 128.27,46.355 on Dimensions

## Text inside footprints (layer, text, board x,y; h text height)
SW9: Top Overlay "NN" at 29.449,37.656 h1.02 r90